# EAGLE board Main Logic (EAGLE 8.2.2)
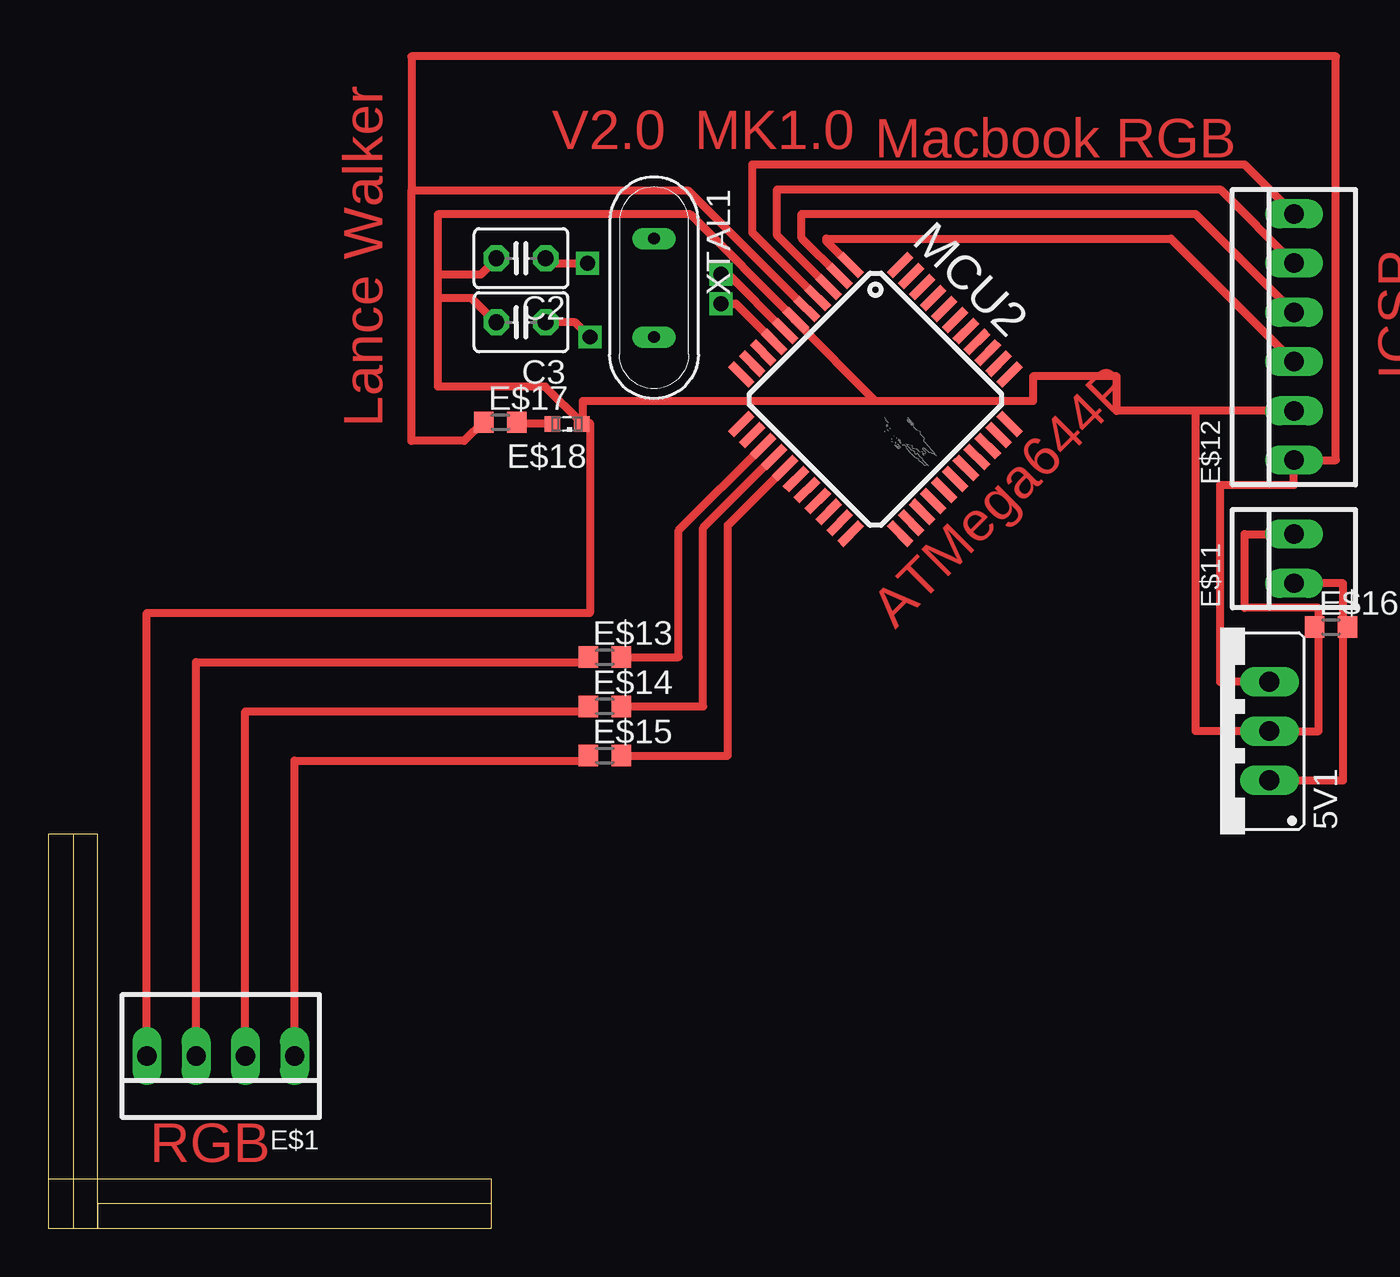
[diagram p0: board, top side]
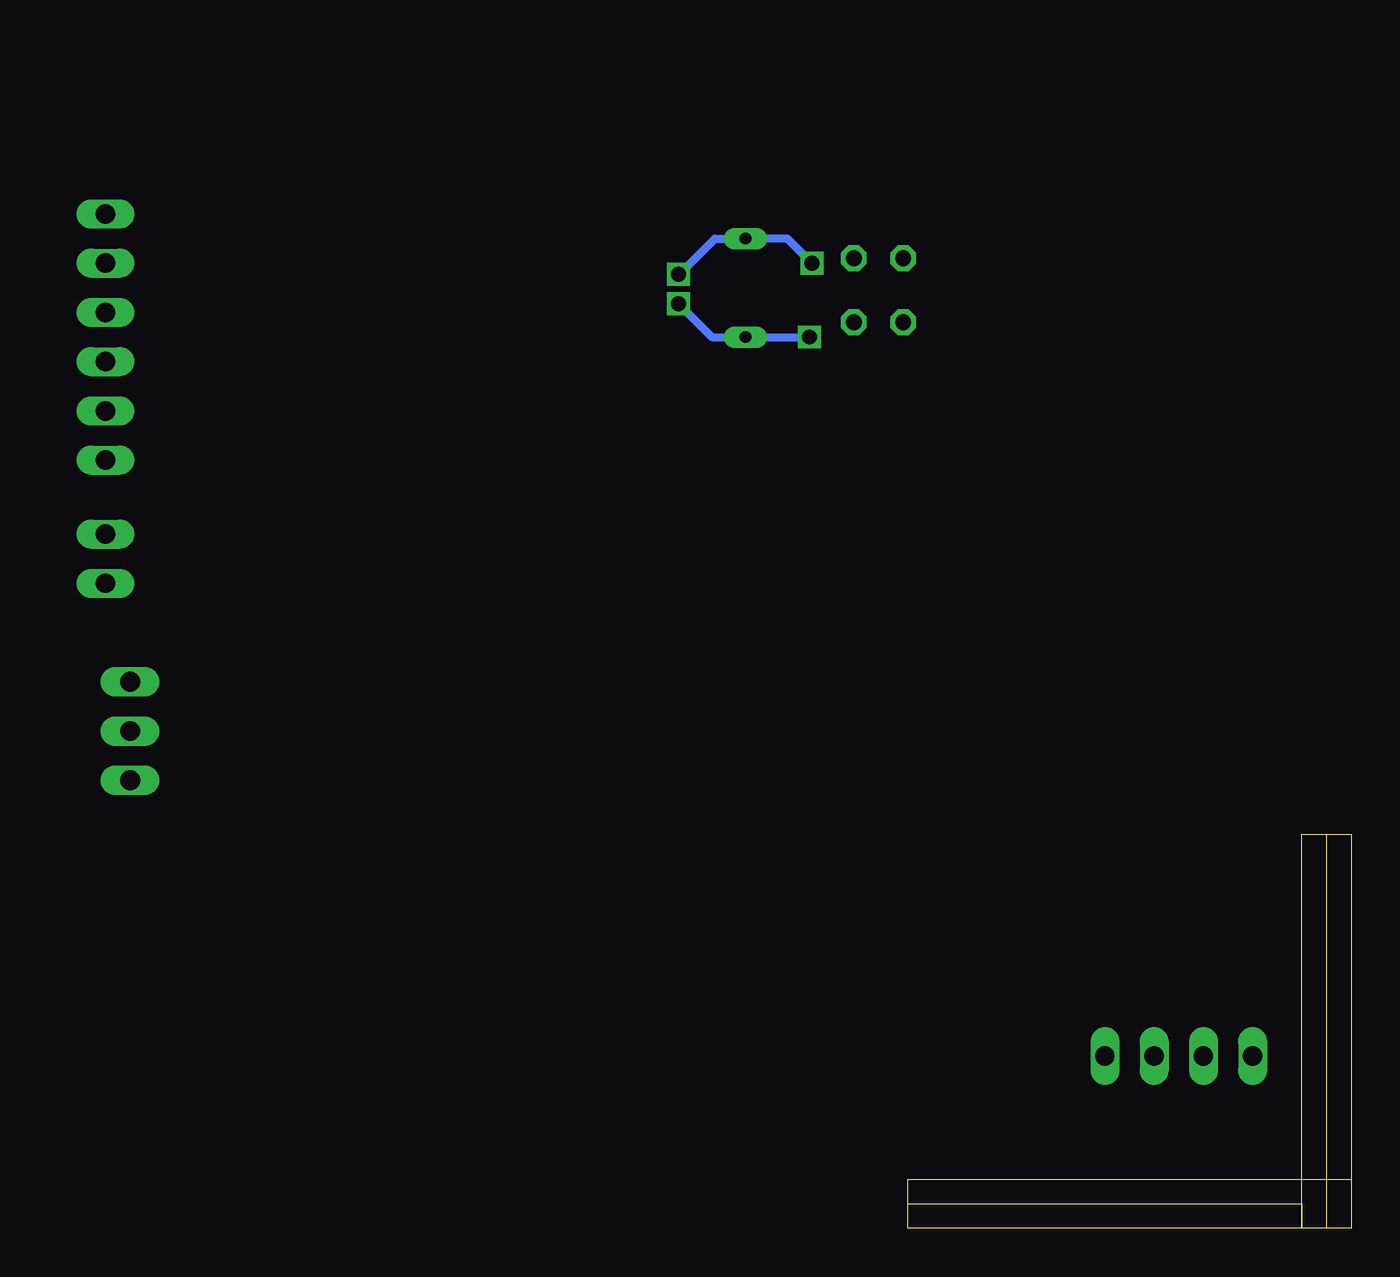
[diagram p1: board, bottom side, seen from below]

Size 22.86 x 20.32 mm. Coordinates in mm from the lower left corner, seen from the top.
Copper layers (1*16): Top 0.035mm / dielectric 1.5mm / Bottom 0.035mm
Design rules "default": minimum track width 10mil, minimum drill 24mil, track to track 8mil, track to pad 8mil, pad to pad 8mil, via to via 8mil, smd to smd 8mil, copper to edge 40mil, drill to drill 8mil, minimum pad ring 10mil, minimum via ring 8mil, stop-mask expansion 4mil, vias tented up to drill 0mil, thermal gap 10mil
Milling: area 1.3,0 to 2.5,20.3; area 2.5,0 to 22.9,1.3; area 0,0 to 2.5,20.3; area 0,0 to 22.9,2.5; area 0,0 to 22.9,2.5

## Footprints (pad centres in the part's own frame; a part is rotated, then mirrored left to right if it is on the bottom)
78XXS = drill 1.016 long: GND 0,-2.54; IN -2.54,-2.54; OUT 2.54,-2.54
C025-030X050 = drill 0.813 octagon: 1 -1.27,0; 2 1.27,0
22-23-2041 = drill 1 long: 1 -3.81,0; 2 -1.27,0; 3 1.27,0; 4 3.81,0
22-23-2021 = drill 1 long: 1 -1.27,0; 2 1.27,0
22-23-2061 = drill 1 long: 1 -6.35,0; 2 -3.81,0; 3 -1.27,0; 4 1.27,0; 5 3.81,0; 6 6.35,0
R0603 = smd 1 x 1.1: 1 -0.85,0; 2 0.85,0
LED_SML0603 = smd 0.8 x 0.8: A 0.75,0; C -0.75,0
TQFP44 = smd 1.5 x 0.44: 1 -5.8,4; 2 -5.8,3.2; 3 -5.8,2.4; 4 -5.8,1.6; 5 -5.8,0.8; 6 -5.8,0; 7 -5.8,-0.8; 8 -5.8,-1.6; 9 -5.8,-2.4; 10 -5.8,-3.2; 11 -5.8,-4; 23 5.8,-4; 24 5.8,-3.2; 25 5.8,-2.4; 26 5.8,-1.6; 27 5.8,-0.8; 28 5.8,0; 29 5.8,0.8; 30 5.8,1.6; 31 5.8,2.4; 32 5.8,3.2; 33 5.8,4 | smd 0.44 x 1.5: 12 -4,-5.8; 13 -3.2,-5.8; 14 -2.4,-5.8; 15 -1.6,-5.8; 16 -0.8,-5.8; 17 0,-5.8; 18 0.8,-5.8; 19 1.6,-5.8; 20 2.4,-5.8; 21 3.2,-5.8; 22 4,-5.8; 34 4,5.8; 35 3.2,5.8; 36 2.4,5.8; 37 1.6,5.8; 38 0.8,5.8; 39 0,5.8; 40 -0.8,5.8; 41 -1.6,5.8; 42 -2.4,5.8; 43 -3.2,5.8; 44 -4,5.8
QS = drill 0.61 long: 1 -2.54,0; 2 2.54,0

## Placement (x,y rotation side)
5V1  [78XXS]  60.45,25.65 90 top  (outside the outline)
C2  [C025-030X050]  24.38,50.04 180 top  (outside the outline)
C3  [C025-030X050]  24.38,46.74 180 top  (outside the outline)
E$1  [22-23-2041]  8.89,8.89 180 top
E$11  [22-23-2021]  64.26,34.54 90 top  (outside the outline)
E$12  [22-23-2061]  64.26,45.97 90 top  (outside the outline)
E$13  [R0603]  28.7,29.46 0 top  (outside the outline)
E$14  [R0603]  28.7,26.92 0 top  (outside the outline)
E$15  [R0603]  28.7,24.38 0 top  (outside the outline)
E$16  [R0603]  66.18,31.01 0 top  (outside the outline)
E$17  [R0603]  23.32,41.58 0 top  (outside the outline)
E$18  [LED_SML0603]  26.76,41.49 180 top  (outside the outline)
MCU2  [TQFP44]  42.67,42.76 315 top  (outside the outline)
XTAL1  [QS]  31.24,48.51 270 top  (outside the outline)

## Library data of the parts
5V1 = v-reg
C2 C3 = ref-packages
E$1 E$11 E$12 = con-molex
E$13-E$18 = eagle-ltspice
MCU2 = cypress
XTAL1 = special

## Nets
GND1: 5V1.GND E$1.4 E$11.2 E$12.2
INPUT1: 5V1.IN E$11.1
MOSI2: C2.1 XTAL1.1
MOSI3: C3.1 XTAL1.2
S$1: E$1.3
S$2: E$1.2
S$3: E$1.1
S$29: E$12.6
S$30: E$12.5
S$31: E$12.4
S$32: E$12.3
VCC1: 5V1.OUT E$12.1

## Tracks (layer width: path | path; a pad name or v marks a point on that pad's centre or on a via)
GND1
  Top 0.406: E$12.2 59.18,42.16 | 59.18,42.16 59.18,25.65 5V1.GND 65.53,25.65 65.53,32 61.72,32 61.72,35.81 E$11.2 | 59.18,42.16 55.12,42.16 55.12,43.94 50.8,43.94 50.8,42.67 42.67,42.67 | 42.67,42.67 27.56,42.67 27.56,41.53 | 27.56,41.53 27.56,41.4 | 27.56,41.53 27.94,41.53 27.94,31.75 5.08,31.75 E$1.4 | 38.48,46.86 42.67,42.67
INPUT1
  Top 0.406: 5V1.IN 66.8,23.11 66.8,33.27 E$11.1
MOSI2  (via drill 0.76)
  Top 0.406: C2.1 25.91,49.78 v27.81,49.78
  Bottom 0.406: v27.81,49.78 29.08,51.05 XTAL1.1 32.83,51.05 34.66,49.23
MOSI3  (via drill 0.76)
  Top 0.406: v27.94,45.97 27.18,46.74 C3.1
  Bottom 0.406: v27.94,45.97 31.13,45.97 XTAL1.2 32.98,45.97 34.71,47.7
S$1
  Top 0.406: E$1.3 7.62,29.21 27.94,29.21
S$2
  Top 0.406: E$1.2 10.16,26.67 27.94,26.67
S$3
  Top 0.406: E$1.1 12.7,24.13 27.94,24.13
S$14
  Top 0.406: 23.11,50.01 22.3,49.2 20.09,49.2 | 23.11,46.7 21.83,47.98 20.09,47.98 | 20.09,49.2 20.09,52.3 33.12,52.3 38.57,46.85 | 27.53,41.52 25.63,43.42 20.09,43.42 20.09,47.98 | 20.09,47.98 20.09,49.2
S$15
  Top 0.406: 29.97,29.46 32.51,29.46 32.51,36.01 36.91,40.4
S$19
  Top 0.406: 29.97,26.92 33.78,26.92 33.78,36.13 37.54,39.89
S$20
  Top 0.406: 29.97,24.38 35.05,24.38 35.05,36.27 38.15,39.37
S$24  (via drill 0.76)
  other vias: 34.7,49.21
S$25  (via drill 0.76)
  other vias: 34.7,47.69
S$26
  Top 0.406: 26.01,41.49 24.21,41.49
S$27
  Top 0.406: 34.67,49.21 35.08,49.21 37.96,46.33
S$28
  Top 0.406: 34.72,47.7 35.47,47.7 37.35,45.82
S$29
  Top 0.406: 39.71,47.97 36.32,51.36 36.32,54.86 61.72,54.86 E$12.6
S$30
  Top 0.406: 40.27,48.54 37.59,51.22 37.59,53.59 60.45,53.59 E$12.5
S$31
  Top 0.406: 40.84,49.1 38.86,51.08 38.86,52.32 59.18,52.32 E$12.4
S$32
  Top 0.406: 41.38,49.68 40.13,50.93 40.13,51.05 57.91,51.05 E$12.3
VCC1
  Top 0.406: 5V1.OUT 60.45,28.19 60.45,38.35 64.26,38.35 E$12.1 66.42,39.62 66.42,60.45 18.73,60.45 18.73,53.52 | 39.14,47.41 33.03,53.52 18.73,53.52 | 22.41,41.58 21.45,40.62 18.73,40.62 18.73,50.52 18.73,53.52

## Text on the board
Top: Macbook RGB | V2.0 | MK1.0 | ICSP | Lance Walker | ATMega644P | RGB